# Altium PCB PCB2.PcbDoc
Units mil, origin at the board's own origin, x right, y up, seen from the top; angles counter-clockwise.
Board outline 3250 x 2750 mil, 2 copper layers (Top Layer, Bottom Layer); 8 components, 23 nets, 63 pads, 10 vias.
Unrouted connection lines stored in the file: 4.
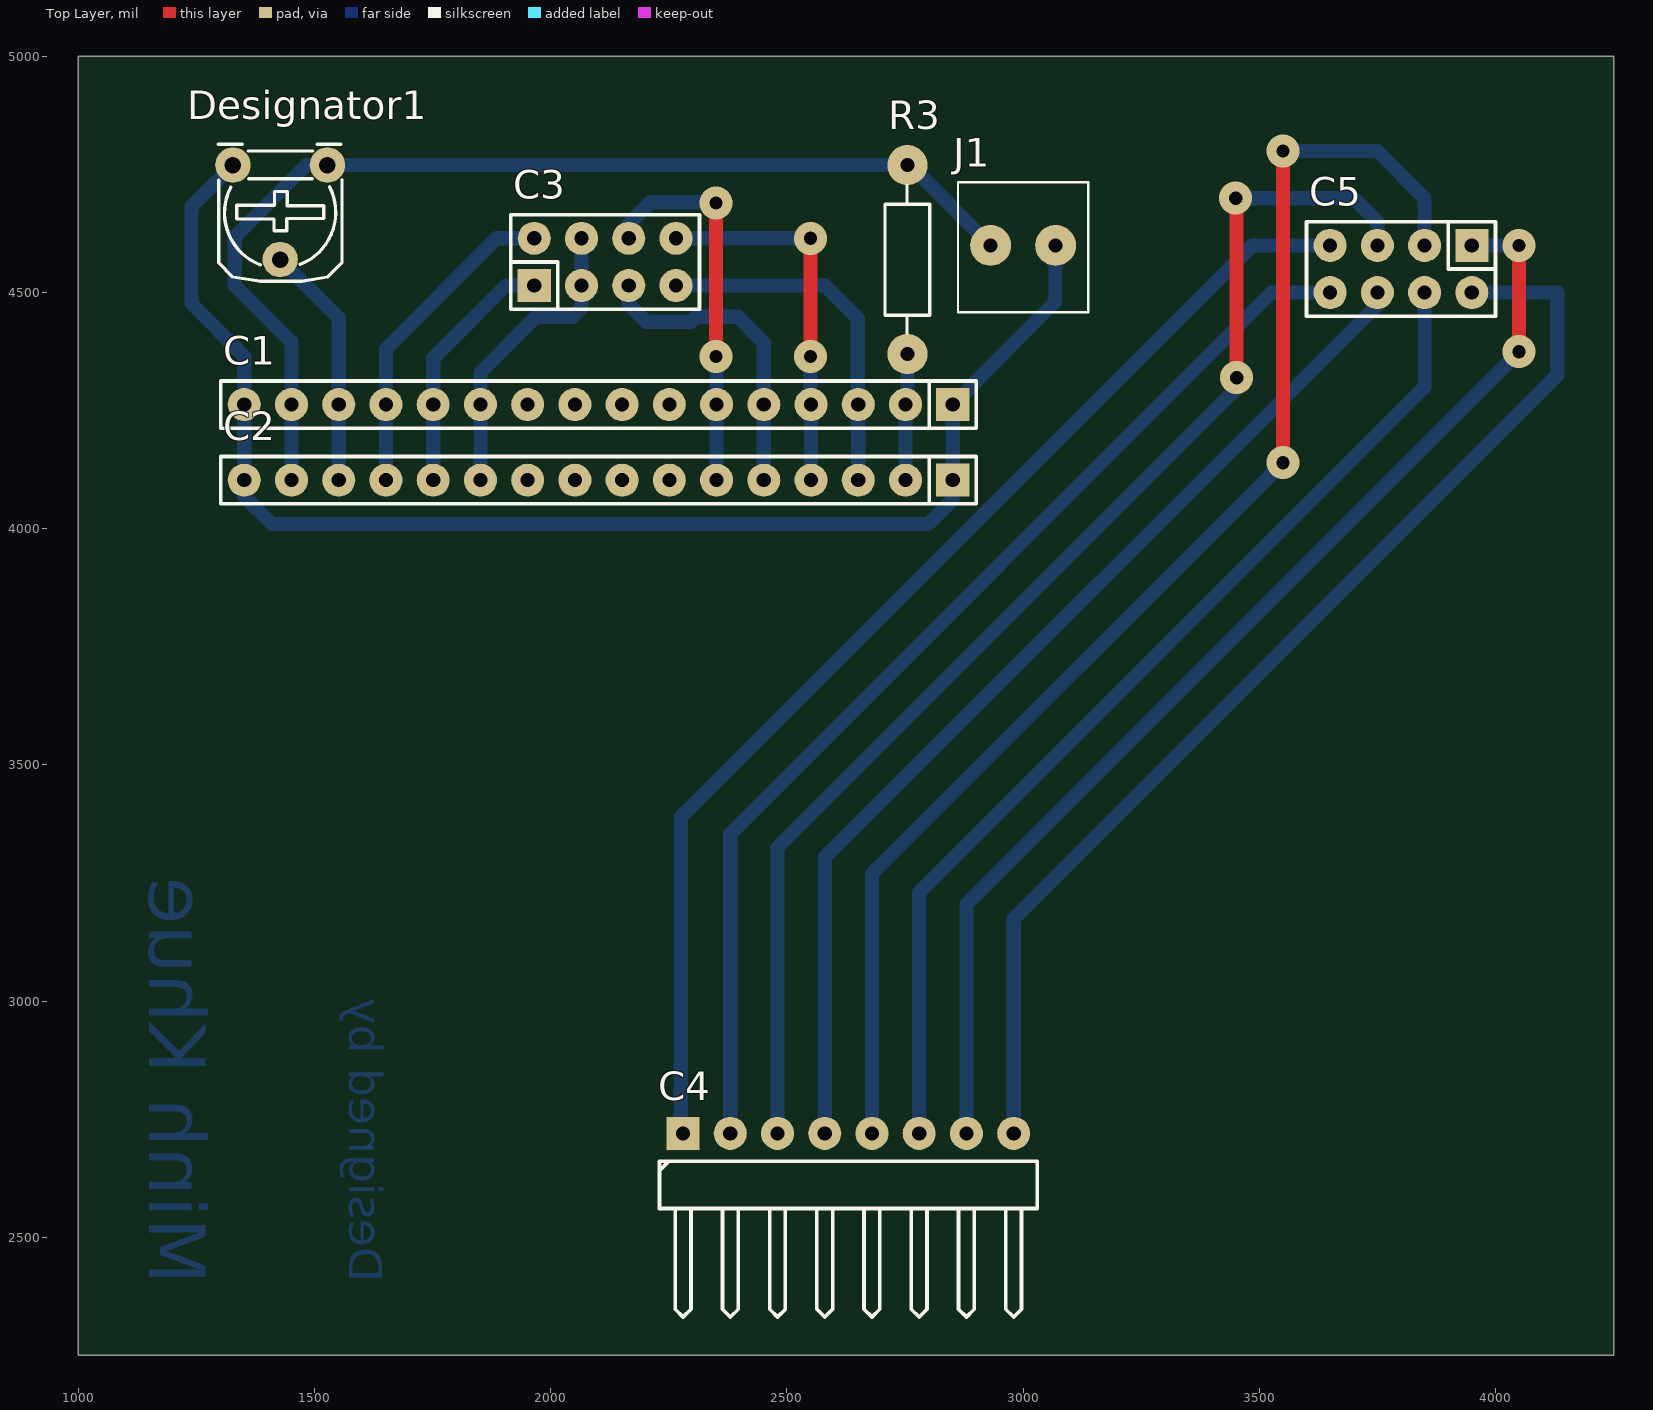
[diagram p0: Top Layer view]
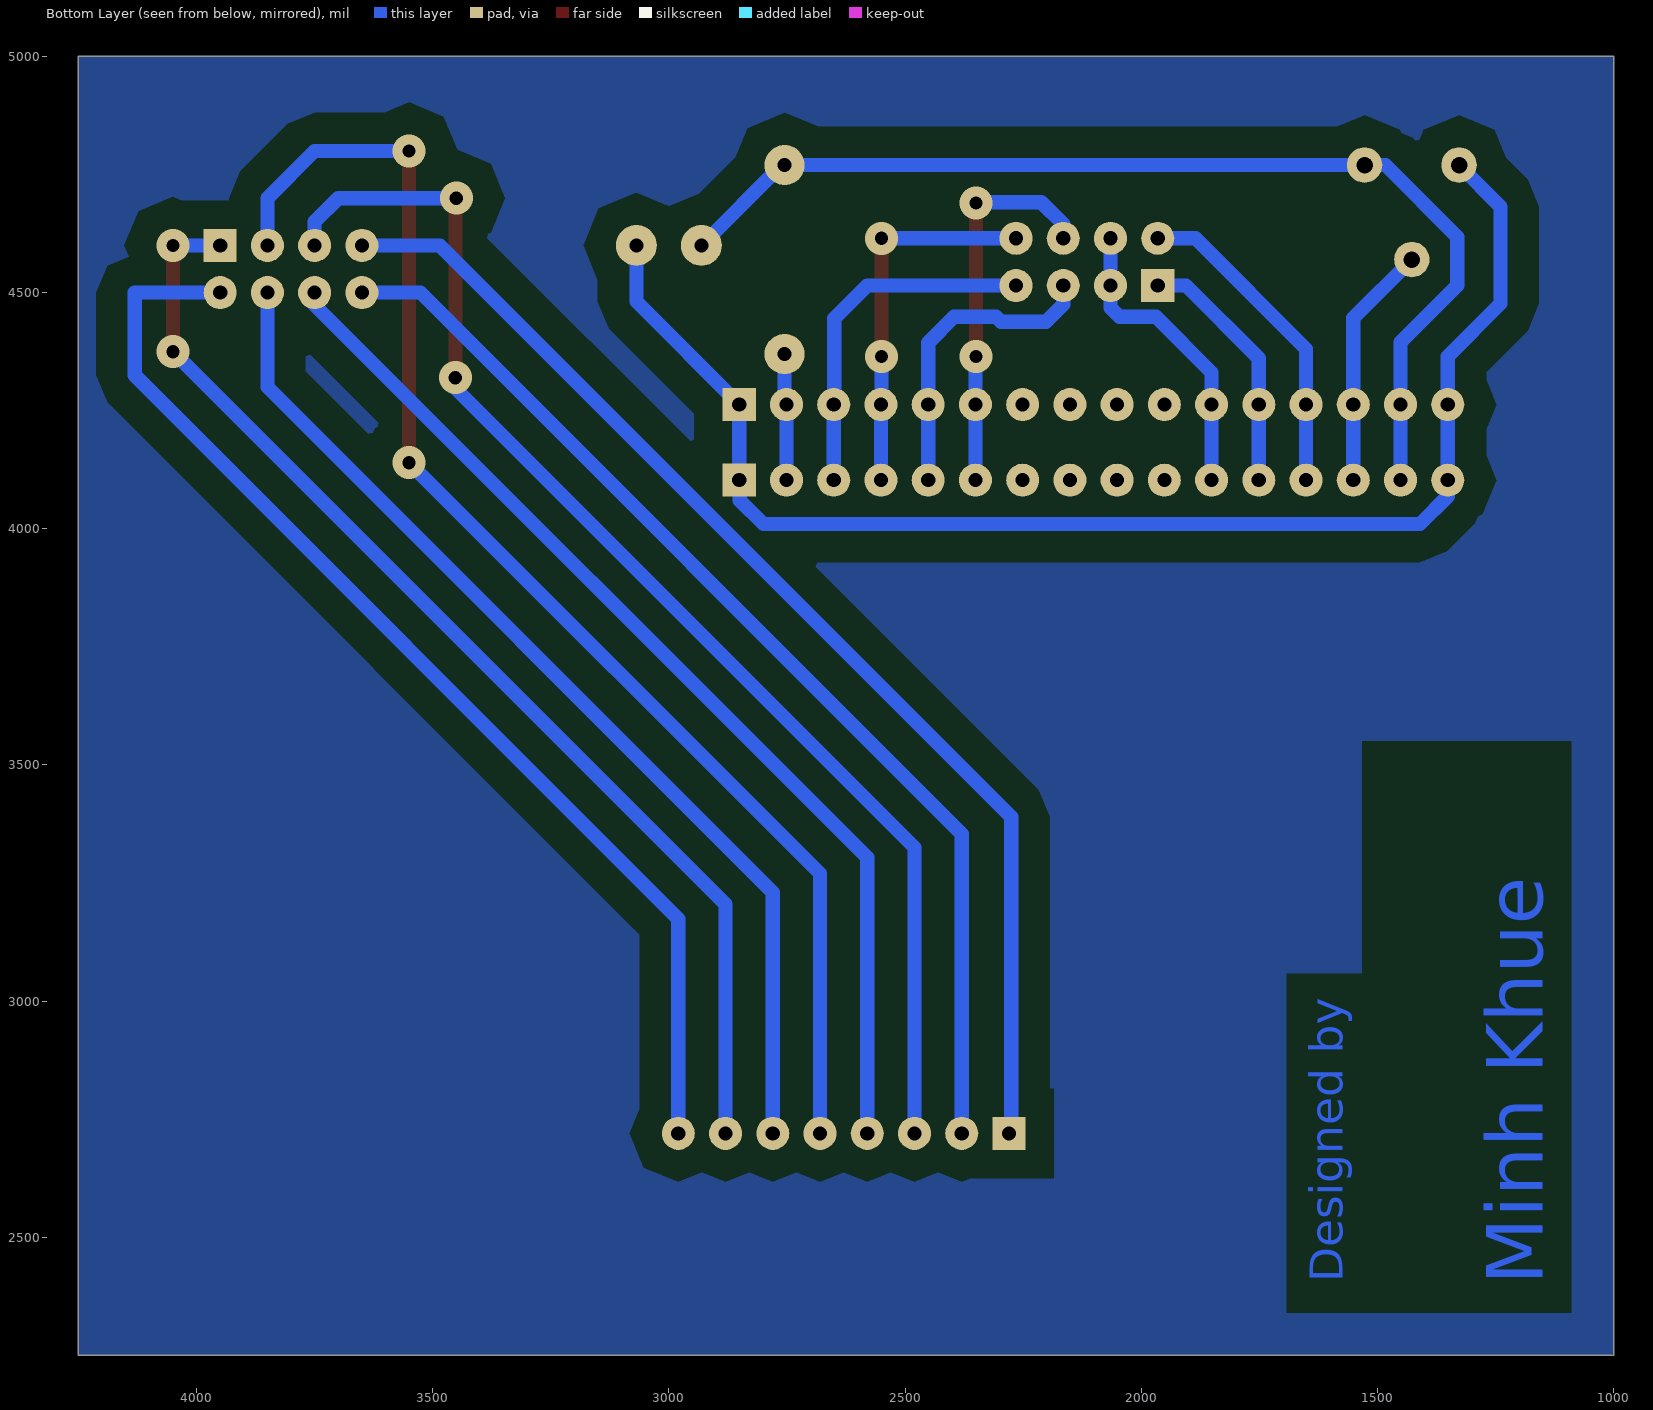
[diagram p1: Bottom Layer view, seen from below]
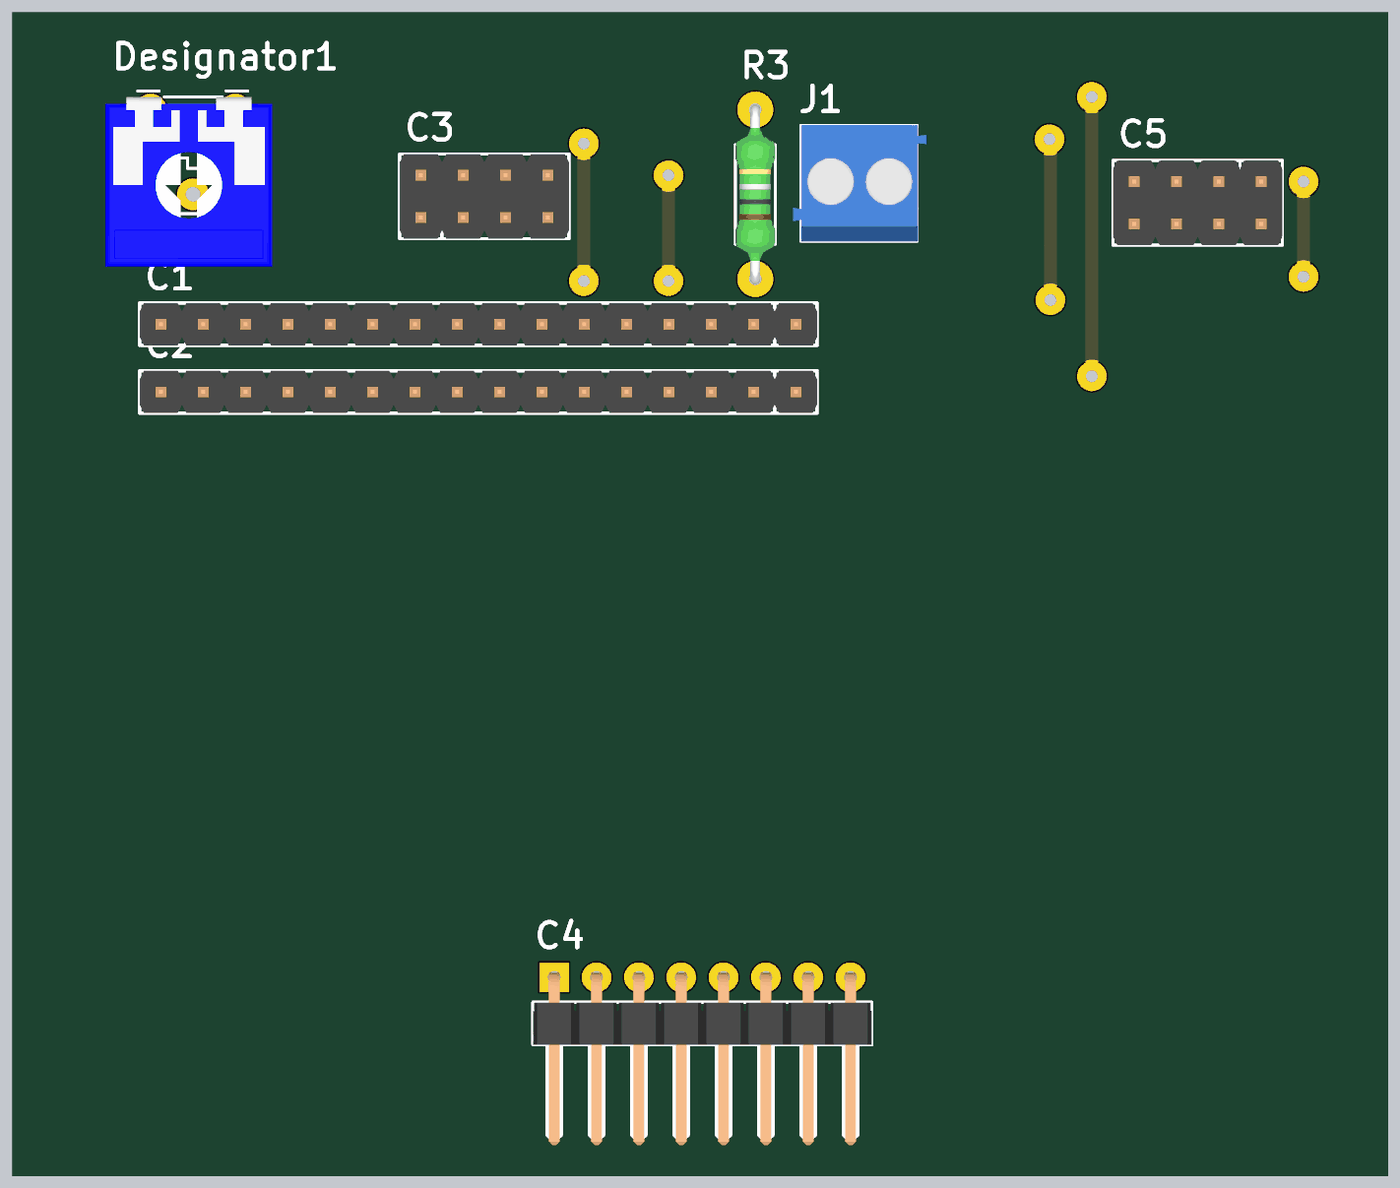
[diagram p2: 3D render of the assembled board from above, using the file's embedded part models]

## Layer stack, top to bottom
Top Solder: solder mask 0.4, Solder Resist, Dk 3.5
Top Layer: signal copper 1.4
Dielectric 1: dielectric 12.6, FR-4, Dk 4.8
Bottom Layer: signal copper 1.4
Bottom Solder: solder mask 0.4, Solder Resist, Dk 3.5

## Board outline
1000,2250 1000,5000 4250,5000 4250,2250

## Design rules (kind name [scope] priority, off if disabled: settings)
Clearance Clearance_1 [InPolygon] p1: gap=60
Clearance [All vs InPolygon] p2: gap=60
PolygonConnect [All] p1: connectstyle=Relief reliefconductorwidth=10 reliefentries=4 polygonreliefangle="90 Angle" airgapwidth=10
RoutingCorners RoutingCorners_1 [InPolygon] p1: cornerstyle=45-Degree minsetback=100 maxsetback=100
RoutingCorners [All] p2: cornerstyle=45-Degree minsetback=100 maxsetback=100
RoutingVias [All] p1: holewidth=28 width=80 viastyle="Through Hole" minholewidth=28 minwidth=80 maxholewidth=28 maxwidth=80
SolderMaskExpansion [All] p1: expansion=4
Width [All] p1: maxlimit=30 minlimit=20 preferedwidth=30
29 further rules are at their usual default settings.

## Classes and differential pairs
component class Sheet1: C1 C2 C3 C4 C5 J1 R3

## Components (designator, comment, footprint, x,y, rotation, side; value= is the part's Value field where it differs from the comment)
C1 "JP16" JP16-D1T 2851,4263 r180 top
C2 "JP16" JP16-D1T 2851,4103 r180 top
C3 "JP4x2" JP4-D2T 2115,4565 r0 top locked
C4 "JP8" JP8-D1C 3030,2620 r0 top
C5 "JP4x2" JP4-D2T 3800,4550 r180 top locked
Designator1 "Comment" VR-S2 1527,4770 r180 top
J1 "KF2" KF2-3.5 3000,4600 r0 top
R3 "Res" RES-1/4W 2750,4555 r270 top

## Footprints (in the part's own frame and the unit in brackets; to place one, negate y for a bottom-side part, rotate by r counter-clockwise, add the part's x,y. Pads: shape width x height; smd on the part's side, far side on the other; paste and mask are expansions set on the pad)
JP4-D2T [mil] "8 pins, dual pin, straight, gold plating"
  rect 70x70 hole 30: 1(-150,-50)
  round 70 hole 30: 2(-50,-50) 3(50,-50) 4(150,-50) 5(150,50) 6(50,50) 7(-50,50) 8(-150,50)
  silkscreen extent -200,-100 200,100, body extent -200,-100 200,100, height 337
JP8-D1C [mil] "8 pins, 1 row, right angled, gold plating"
  rect 70x70 hole 30: 1(-750,100)
  round 70 hole 30: 2(-650,100) 3(-550,100) 4(-450,100) 5(-350,100) 6(-250,100) 7(-150,100) 8(-50,100)
  silkscreen extent -800,-289 0,41, body extent -800,-296 0,112, height 100
JP16-D1T [mil] "16  pins, 1 row, straight, gold plating"
  rect 70x70 hole 30: 1(0,0)
  round 70 hole 30: 2(100,0) 3(200,0) 4(300,0) 5(400,0) 6(500,0) 7(600,0) 8(700,0) 9(800,0) 10(900,0) 11(1000,0) 12(1100,0) 13(1200,0) 14(1300,0) 15(1400,0) 16(1500,0)
  silkscreen extent -50,-50 1550,50, body extent -50,-50 1550,50, height 336
KF2-3.5 [mm] "3,50mm - modular - blue - Horizontal wire entry - Pressure clamp - 8,4mm height - 02p"
  round 2.2 hole 0.762: 1(-1.75,0) 2(1.75,0)
  silkscreen extent -3.5,-3.6 3.5,3.4, body extent -3.95,-3.6 4.05,3.4, height 8.41
RES-1/4W [mil]
  round 85 hole 30: 1(-215,5) 2(185,5)
  silkscreen extent -173,-42 141,52, body extent -227,-42 197,52, height 95
VR-S2 [mil] "Resistor Variable"
  round 75 hole 35: 1(0,0) 2(100,200) 3(200,0)
  silkscreen extent -31,-44 231,246, body extent -87,-30 307,372, height 165

## Part data
C1 C2 C4: "WR-PHD 2.54 mm Angled Socket Header"
C3 C5: "WR-PHD 2.54 mm Dual Socket Header"

## Via types
v1: diameter 70, hole 28, Top Layer to Bottom Layer, 10 vias

## Nets (pads, with @x,y where several pads share a name; then routed paths per layer and width w, separated by ;. In a path a pad name is that pad's centre, name@x,y a point inside that pad or via, vN(x,y) a via of type N, cw(c..) or ccw(c..) an arc to the next point about the centre after c; other vN are vias at no path point)
GND: C1.1 C1.16 C2.1 C2.16 Designator1.3 J1.2 | length 2958.7
  Bottom Layer w30: Designator1.3 1239,4682 1239,4477 1351,4365 C1.16 C2.16 1351,4069 1410,4010 2800,4010 2850,4060 2850,4102 C2.1 C1.1 3068.9,4480.9 J1.2
NetC1_2: C1.2 C2.2 R3.2 | length 268.7
  Bottom Layer w30: C2.2 C1.2 2755,4267 R3.2
NetC1_3: C1.3 C2.3 C3.4 | length 756.4
  Bottom Layer w30: C3.4 2580,4515 2650,4445 2650,4264 C1.3 C2.3
NetC1_4: C1.4 C2.4 C3.5 | length 797.4
  Top Layer w30: v1(2550,4365) v1(2550,4615)
  Bottom Layer w30: C3.5 v1(2550,4615) ; v1(2550,4365) 2550,4264 C1.4 C2.4
NetC1_5: C1.5 C2.5 C3.3 | length 659.2
  Bottom Layer w30: C3.3 2165,4475 2201.5,4438.5 2296.88,4438.5 2307.38,4449 2396,4449 2451,4394 C1.5 C2.5
NetC1_6: C1.6 C2.6 C3.6 | length 822.3
  Top Layer w30: v1(2350,4365) v1(2350,4690)
  Bottom Layer w30: C3.6 2165,4645 2211.5,4691.5 2348.5,4691.5 v1(2350,4690) ; v1(2350,4365) 2351,4364 C1.6 C2.6
NetC1_7: C1.7 C2.7
NetC1_8: C1.8 C2.8
NetC1_9: C1.9 C2.9
NetC1_10: C1.10 C2.10
NetC1_11: C1.11 C2.11 C3.2 C3.7 | length 645.7
  Bottom Layer w30: C2.11 C1.11 1851,4331 1969,4449 2046,4449 2065,4468 C3.2 C3.7
NetC1_12: C1.12 C2.12 C3.1 | length 512.8
  Bottom Layer w30: C2.12 C1.12 ; C1.12@1751,4286 1751,4361 1905,4515 C3.1
NetC1_13: C1.13 C2.13 C3.8 | length 688.9
  Bottom Layer w30: C2.13 C1.13 1651,4381 1885,4615 C3.8
NetC1_14: C1.14 C2.14 Designator1.2 | length 518.4
  Bottom Layer w30: Designator1.2 1551,4446 C1.14 C2.14
NetC4_1: C4.1 C5.4 | length 2548.3
  Bottom Layer w30: C4.1 2275,2725 2275,3390 3485,4600 C5.4
NetC4_2: C4.2 C5.5 | length 2378.7
  Bottom Layer w30: C4.2 2380,3353.99 3526.01,4500 C5.5
NetC4_3: C4.3 C5.3 | length 2754.2
  Top Layer w30: v1(3450,4700) 3452.07,4697.93 v1(3452.07,4320)
  Bottom Layer w30: C4.3 2480,3325 3452.07,4297.07 v1(3452.07,4320) ; v1(3450,4700) 3700,4700 3750,4650 C5.3
NetC4_4: C4.4 C5.6 | length 2264.6
  Bottom Layer w30: C4.4 2580,3303.99 3750,4473.99 C5.6
NetC4_5: C4.5 C5.2 | length 2881.8
  Top Layer w30: v1(3550,4140) v1(3550,4800)
  Bottom Layer w30: C4.5 2680,3270 v1(3550,4140) ; v1(3550,4800) 3750,4800 3850,4700 C5.2
NetC4_6: C4.6 C5.7 | length 2223.2
  Bottom Layer w30: C4.6 2780,3230 3850,4300 C5.7
NetC4_7: C4.7 C5.1 | length 2464.6
  Top Layer w30: v1(4050,4375) v1(4050,4600)
  Bottom Layer w30: C4.7 2880,3205 v1(4050,4375) ; C5.1 v1(4050,4600)
NetC4_8: C4.8 C5.8 | length 2437.8
  Bottom Layer w30: C4.8 2980,3174 4131,4325 4131,4500 C5.8
VCC: C1.15 C2.15 Designator1.1 J1.1 R3.1 | length 2298.2
  Bottom Layer w30: C2.15 C1.15 1451,4395 1331,4515 1331,4618 1483,4770 Designator1.1 R3.1 2761.1,4770 J1.1

## Polygon pours and split planes (outlines as drawn)
no net on Bottom Layer "Mechanical 1-No Net" (solid, pour order 5): 1000,5000 4250,5000 4250,2250 1000,2250 1000,5000

## Other copper
Bottom Layer:
  pour cut-out: 1860,4710 1853,4703 1853,4654 1725,4526 1631.59,4451.59 1522.77,4560.42 1496,4703 1658,4710
  pour cut-out: 2040,4389 2074,4423 2187,4423 2235,4375 2235,4341 2234,4341 2218,4325 2059,4325 2040,4344
  pour cut-out: 2600,4700 2750,4700 2950,4500 2950,4450 2850,4350 2750,4450 2700,4450 2600,4550
  text "Designed by" at 1550,2405 h120 r270
  text "Minh Khue" at 1150,2400 h120 r270